# EAGLE board 119_01_INTELLIGENT_SENSOR_BOARD (EAGLE 9.6.2)
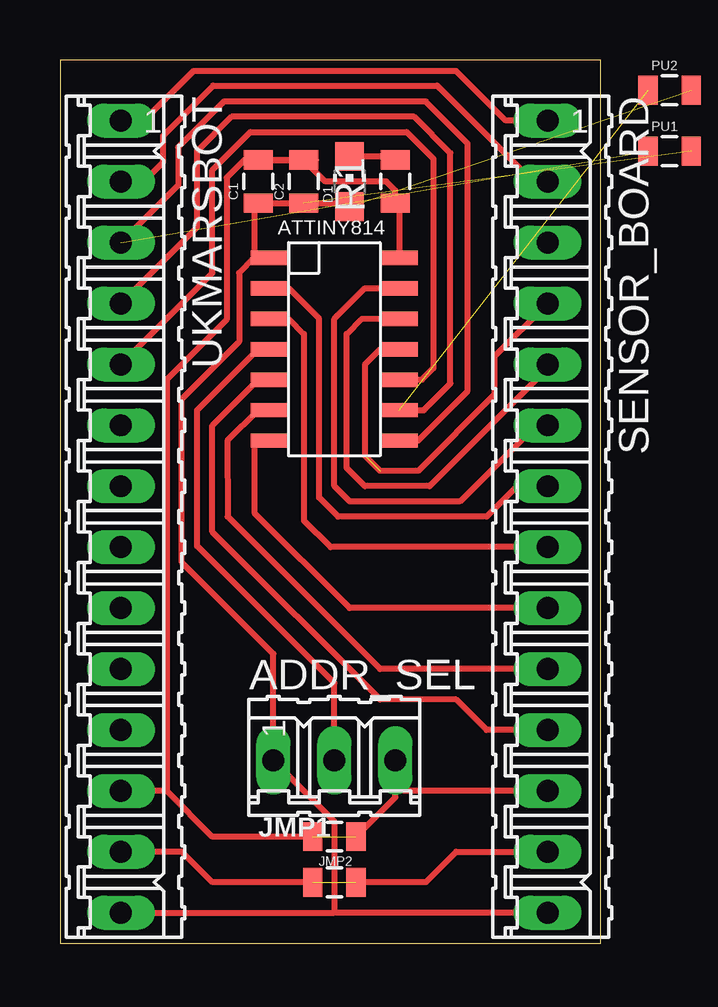
[diagram p0: board, top side]
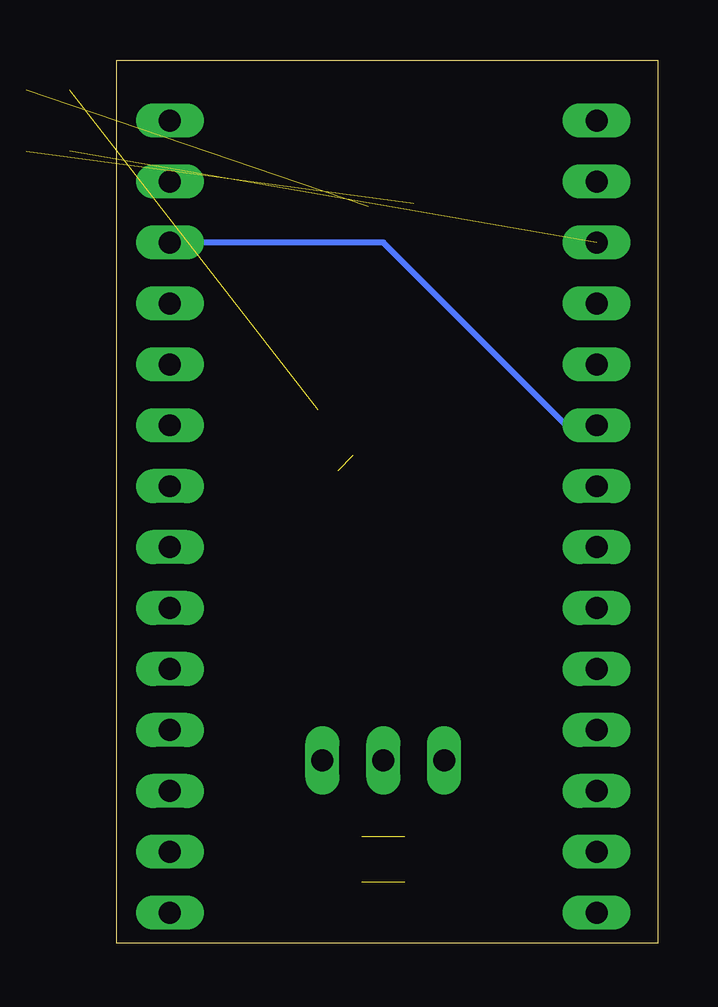
[diagram p1: board, bottom side, seen from below]

Size 22.53 x 36.82 mm. Coordinates in mm from the lower left corner, seen from the top.
Outline: 0,0 22.53,0 22.53,36.82 0,36.82 0,0
Copper layers (1*16): Top 0.035mm / dielectric 1.5mm / Bottom 0.035mm
Design rules "default": minimum track width 6mil, minimum drill 0.35mm, track to track 6mil, track to pad 6mil, pad to pad 6mil, via to via 6mil, smd to smd 6mil, copper to edge 40mil, drill to drill 6mil, minimum pad ring 10mil, minimum via ring 8mil, stop-mask expansion 4mil, vias tented up to drill 0mil, thermal gap 10mil

## Footprints (pad centres in the part's own frame; a part is rotated, then mirrored left to right if it is on the bottom)
03P = drill 0.914 long: 1 -2.54,0; 2 0,0; 3 2.54,0
0805 = smd 0.8 x 1.2: 1 -0.9,0; 2 0.9,0
CHIP-LED0805 = smd 1.2 x 1.2: A 0,-1.05; C 0,1.05
14P = drill 0.914 long: 1 -16.51,0; 2 -13.97,0; 3 -11.43,0; 4 -8.89,0; 5 -6.35,0; 6 -3.81,0; 7 -1.27,0; 8 1.27,0; 9 3.81,0; 10 6.35,0; 11 8.89,0; 12 11.43,0; 13 13.97,0; 14 16.51,0
ATTINY814 = smd 1.55 x 0.6: P$1 -2.7,3.175; P$2 -2.7,1.905; P$3 -2.7,0.635; P$4 -2.7,-0.635; P$5 -2.7,-1.905; P$6 -2.7,-3.175; P$7 -2.7,-4.445; P$8 2.7,-4.445; P$9 2.7,-3.175; P$10 2.7,-1.905; P$11 2.7,-0.635; P$12 2.7,0.635; P$13 2.7,1.905; P$14 2.7,3.175

## Placement (x,y rotation side)
ADDR_SEL  [03P]  11.43,7.62 0 top
C1  [0805]  8.26,31.75 90 top
C2  [0805]  10.16,31.75 90 top
D1  [CHIP-LED0805]  12.06,31.75 0 top
JMP1  [0805]  11.43,2.54 0 top
JMP2  [0805]  11.43,4.45 180 top
PU1  [0805]  25.4,33.02 0 top
PU2  [0805]  25.4,35.56 0 top
R1  [0805]  13.97,31.75 90 top
SENSOR_BOARD  [14P]  20.32,17.78 270 top
U$1  ATTINY814  [ATTINY814]  11.43,25.4 0 top
UKMARSBOT  [14P]  2.54,17.78 270 top

## Library data of the parts
ADDR_SEL SENSOR_BOARD UKMARSBOT = con-amp-quick; OC_FARNELL: unknown; OC_NEWARK: unknown
C1 C2 = SparkFun-Capacitors
D1 = led
JMP1 JMP2 PU1 PU2 R1 = SparkFun-Passives
U$1 = Stephen

## Nets
3V3: ADDR_SEL.1 C1.1 C2.1 D1.A PU1.2 PU2.2 SENSOR_BOARD.14 U$1.P$1 UKMARSBOT.14
5V: JMP1.1 JMP1.2 SENSOR_BOARD.13 UKMARSBOT.13
[5V]: SENSOR_BOARD.1 UKMARSBOT.1
[GND]: SENSOR_BOARD.2 UKMARSBOT.2
A0: SENSOR_BOARD.8 U$1.P$3
A1: SENSOR_BOARD.7 U$1.P$2
A2: SENSOR_BOARD.6 U$1.P$13
A3: SENSOR_BOARD.5 U$1.P$12
A4: SENSOR_BOARD.4 U$1.P$11
A5: SENSOR_BOARD.3 UKMARSBOT.6
ADDR_BIT: ADDR_SEL.2 U$1.P$4
D6: SENSOR_BOARD.11 U$1.P$5
D11: SENSOR_BOARD.9 U$1.P$7
D12: SENSOR_BOARD.10 U$1.P$6
GND: ADDR_SEL.3 C1.2 C2.2 JMP2.1 JMP2.2 R1.1 SENSOR_BOARD.12 U$1.P$14 UKMARSBOT.12
N$1: D1.C R1.2
N$8: UKMARSBOT.7
N$9: UKMARSBOT.8
N$10: UKMARSBOT.9
N$11: UKMARSBOT.11
N$15: UKMARSBOT.10
SCL: PU1.1 U$1.P$8 UKMARSBOT.3
SDA: PU2.1 U$1.P$9 UKMARSBOT.4
UPDI: U$1.P$10 UKMARSBOT.5

## Tracks (layer width: path | path; a pad name or v marks a point on that pad's centre or on a via)
3V3  (2 unrouted)
  Top 0.254: 8.89,28.73 U$1.P$1 8.1,28.57 | 8.1,28.57 8.1,30.69 C1.1 C2.1 12.04,30.85 D1.A | 8.1,28.57 7.46,27.94 7.46,25.07 5.08,22.69 5.08,15.88 8.89,12.06 ADDR_SEL.1 11.43,5.08 11.43,1.27 | SENSOR_BOARD.14 11.43,1.27 | UKMARSBOT.14 11.43,1.27
5V  (1 unrouted)
  Top 0.254: JMP1.1 6.35,2.54 5.08,3.81 UKMARSBOT.13 | SENSOR_BOARD.13 16.51,3.81 15.24,2.54 JMP1.2
[5V]
  Top 0.254: SENSOR_BOARD.1 18.57,34.29 16.51,36.35 5.56,36.35 3.49,34.29 UKMARSBOT.1
[GND]
  Top 0.254: SENSOR_BOARD.2 19.72,31.75 15.72,35.75 6.38,35.75 4.29,33.65 4.29,32.54 3.49,31.75 UKMARSBOT.2
A0
  Top 0.254: U$1.P$3 9.53,26.04 10.16,25.4 10.16,17.62 11.27,16.51 SENSOR_BOARD.8
A1
  Top 0.254: 8.75,27.33 U$1.P$2 9.53,27.3 10.79,26.04 10.79,18.57 11.59,17.78 17.78,17.78 19.05,19.05 SENSOR_BOARD.7
A2
  Top 0.254: SENSOR_BOARD.6 19.84,21.59 16.67,18.41 12.06,18.41 11.43,19.05 11.43,26.04 12.7,27.3 U$1.P$13
A3
  Top 0.254: SENSOR_BOARD.5 20.32,23.97 15.4,19.05 12.7,19.05 11.94,19.81 11.94,25.4 12.57,26.04 U$1.P$12
A4  (1 unrouted)
  Top 0.254: U$1.P$11 13.34,24.77 12.7,24.13 12.7,20.32 13.34,19.68 | 12.71,20.33 13.35,19.68 14.92,19.68 18.1,22.86 18.1,24.45 SENSOR_BOARD.4
A5
  Bottom 0.254: UKMARSBOT.6 3.81,21.59 11.43,29.21 SENSOR_BOARD.3
ADDR_BIT
  Top 0.254: U$1.P$4 8.26,24.77 5.71,22.23 5.71,16.56 11.43,10.84 ADDR_SEL.2
D6
  Top 0.254: SENSOR_BOARD.11 17.78,8.89 16.51,10.16 13.34,10.16 6.35,17.14 6.35,21.59 8.26,23.5 U$1.P$5
D11
  Top 0.254: 20.95,13.97 SENSOR_BOARD.9 12.06,13.97 8.1,17.94 8.1,20.95 U$1.P$7 | 8.26,20.95 U$1.P$7 | U$1.P$7 8.89,20.8
D12
  Top 0.254: SENSOR_BOARD.10 13.34,11.43 6.98,17.78 6.98,20.95 8.26,22.23 U$1.P$6
GND  (1 unrouted)
  Top 0.254: 21.59,6.35 SENSOR_BOARD.12 13.97,6.35 ADDR_SEL.3 13.97,6.08 JMP2.1 | 13.97,28.73 U$1.P$14 14.13,30.64 R1.1 13.97,31.38 13.6,31.75 11.06,31.75 C2.2 | C1.2 C2.2 | 10.67,32.65 C2.2 | C2.2 7.68,32.65 6.94,31.91 6.94,25.99 4.45,23.5 4.45,6.35 | 4.45,6.35 UKMARSBOT.12 | JMP2.2 6.35,4.45 4.45,6.35
N$1
  Top 0.254: R1.2 13.87,32.8 D1.C
SCL  (1 unrouted)
  Top 0.254: U$1.P$8 14.92,20.95 16.99,23.02 16.99,33.34 15.24,35.08 6.83,35.08 4.92,33.18 4.92,31.59 UKMARSBOT.3
SDA  (1 unrouted)
  Top 0.254: U$1.P$9 15.16,22.23 16.27,23.34 16.27,32.94 14.76,34.45 7.14,34.45 5.71,33.02 5.71,29.84 UKMARSBOT.4
UPDI
  Top 0.254: 14.61,23.5 U$1.P$10 15.08,23.5 15.56,23.97 15.56,32.7 14.45,33.81 7.93,33.81 6.35,32.23 6.35,27.94 UKMARSBOT.5